# Altium PCB PS2Transiever.PcbDoc
Units mm, origin at the board's own origin, x right, y up, seen from the top; angles counter-clockwise.
Board outline 40 x 27 mm, 2 copper layers (Top Layer, Bottom Layer), stack 1.571 mm thick; 10 components, 12 nets, 36 pads, 4 vias.
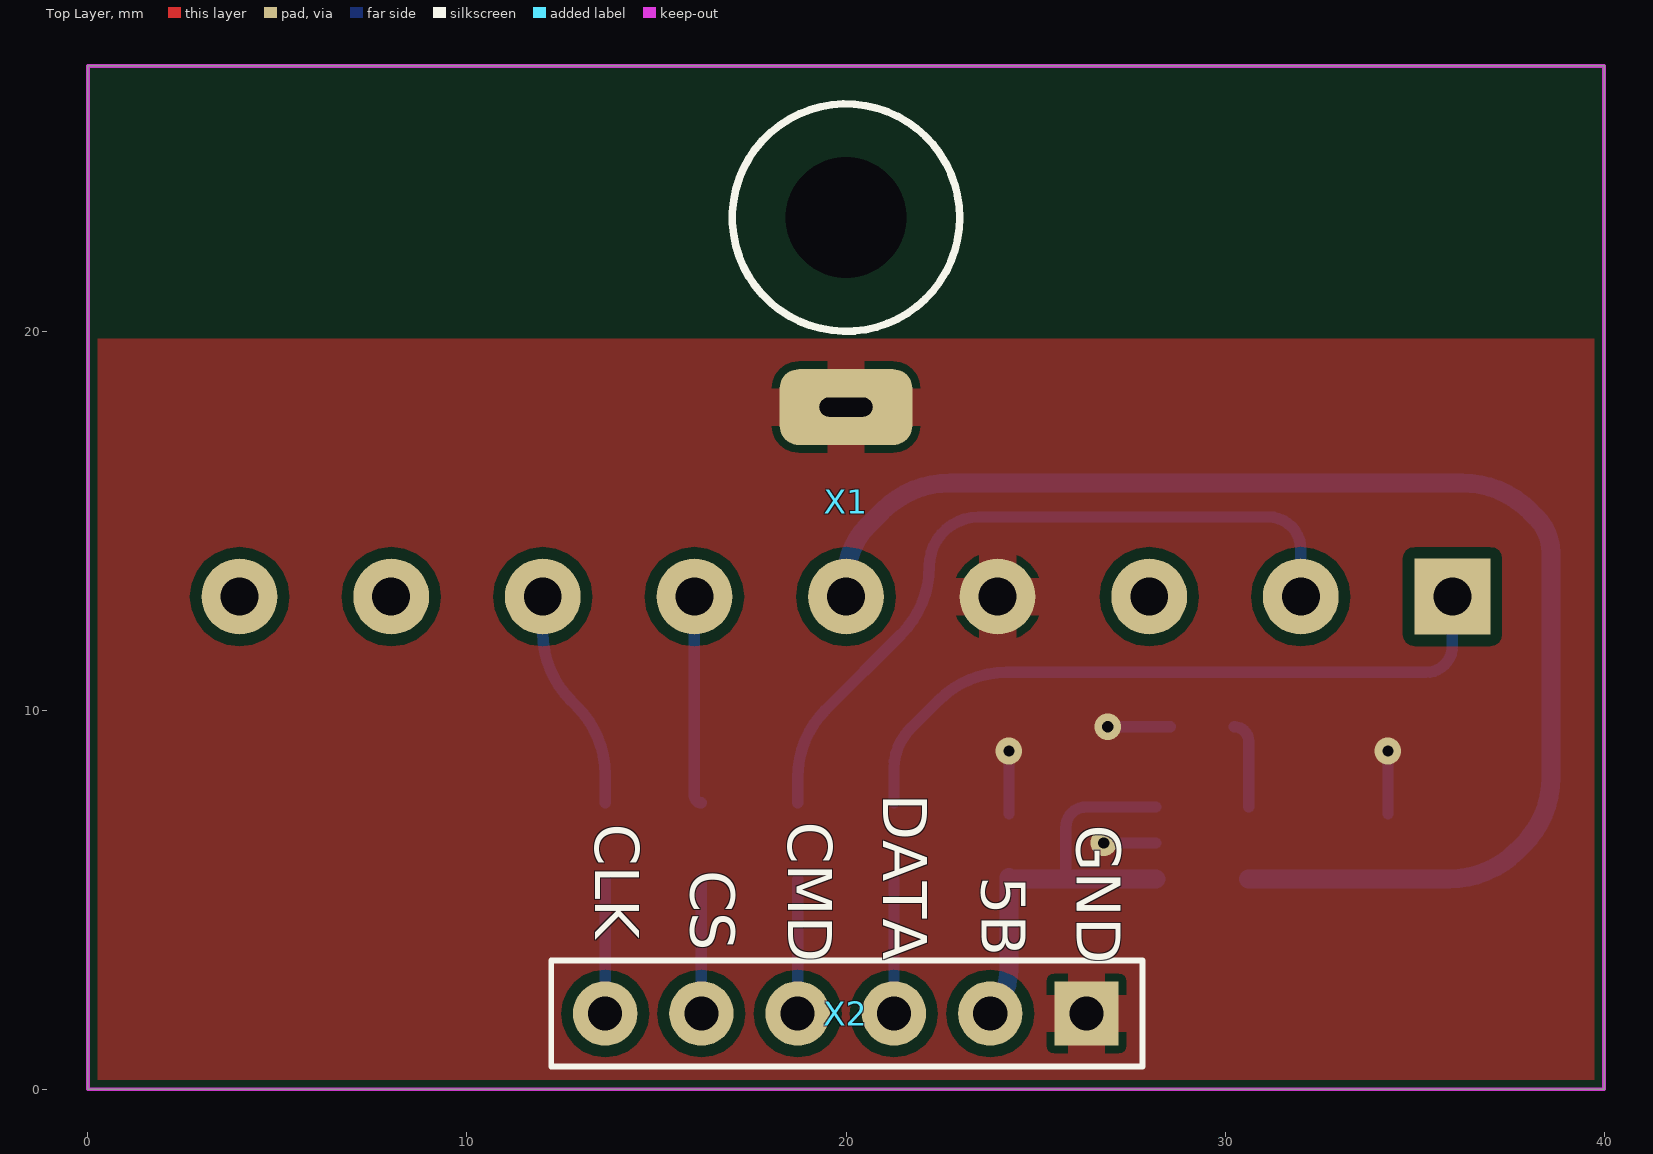
[diagram p0: Top Layer view]
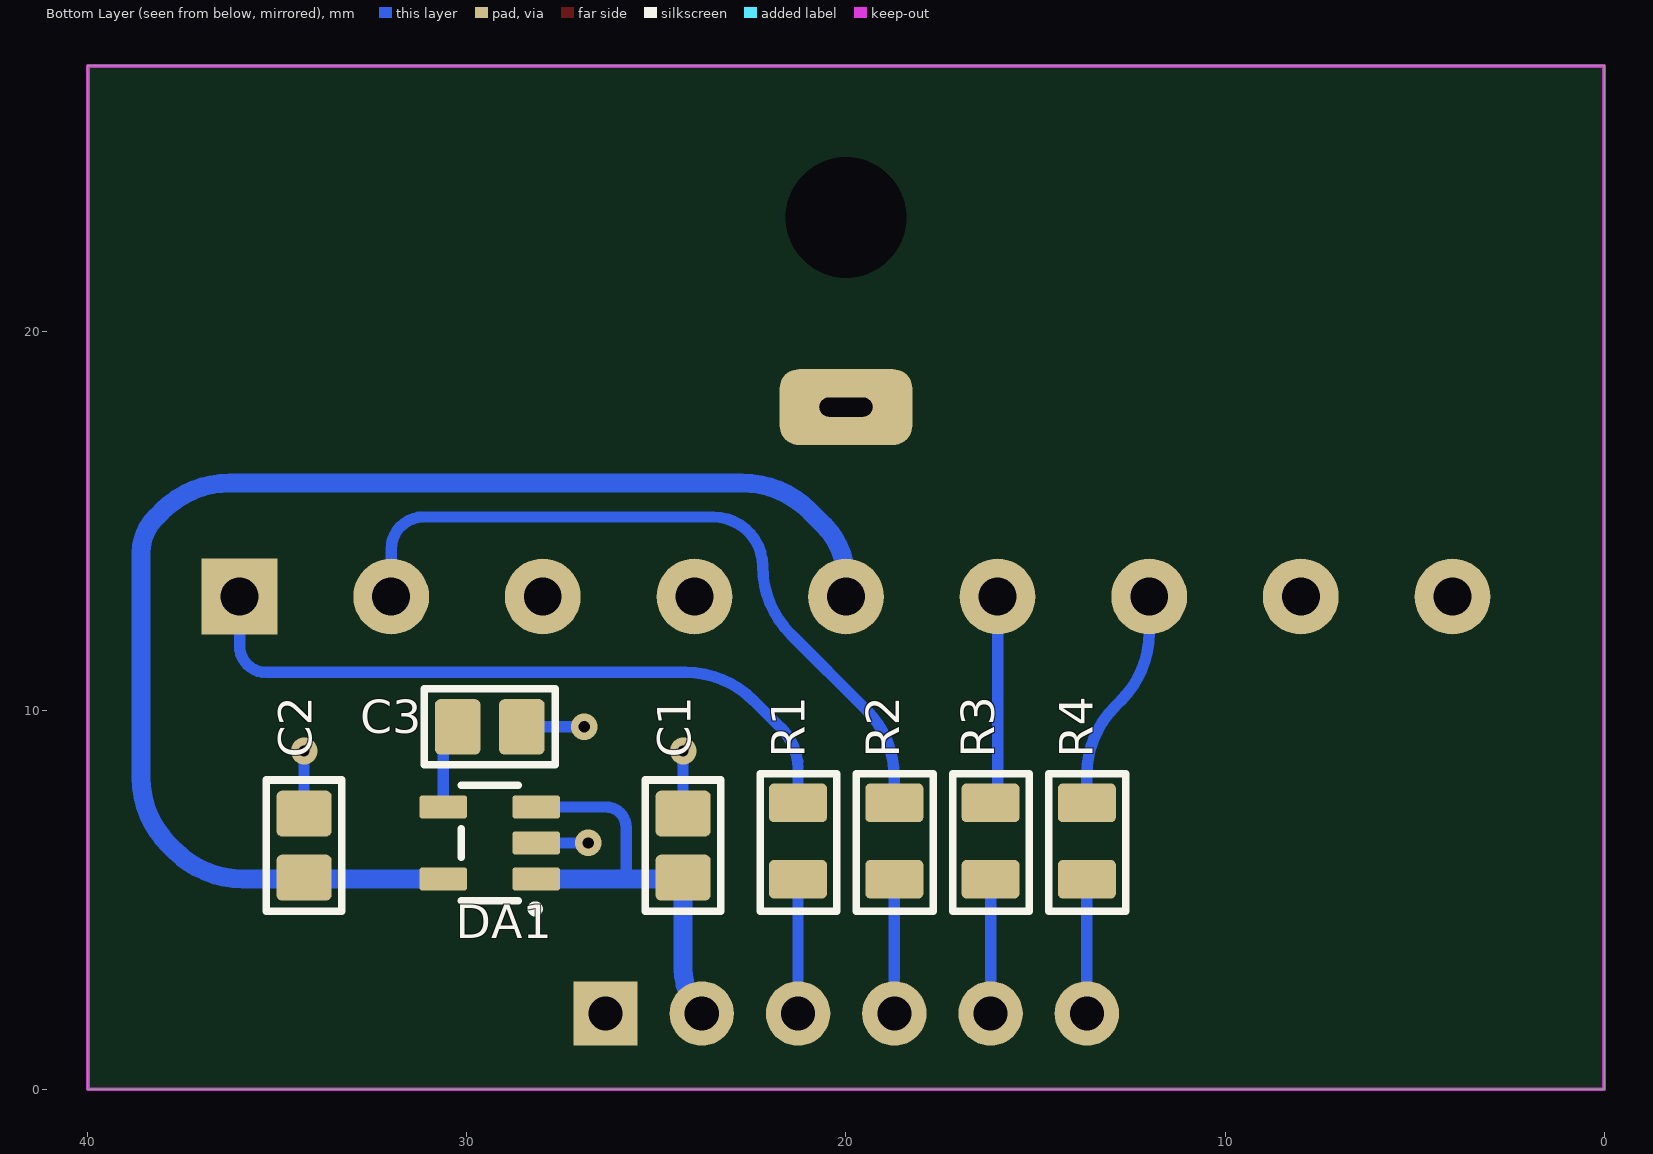
[diagram p1: Bottom Layer view, seen from below]
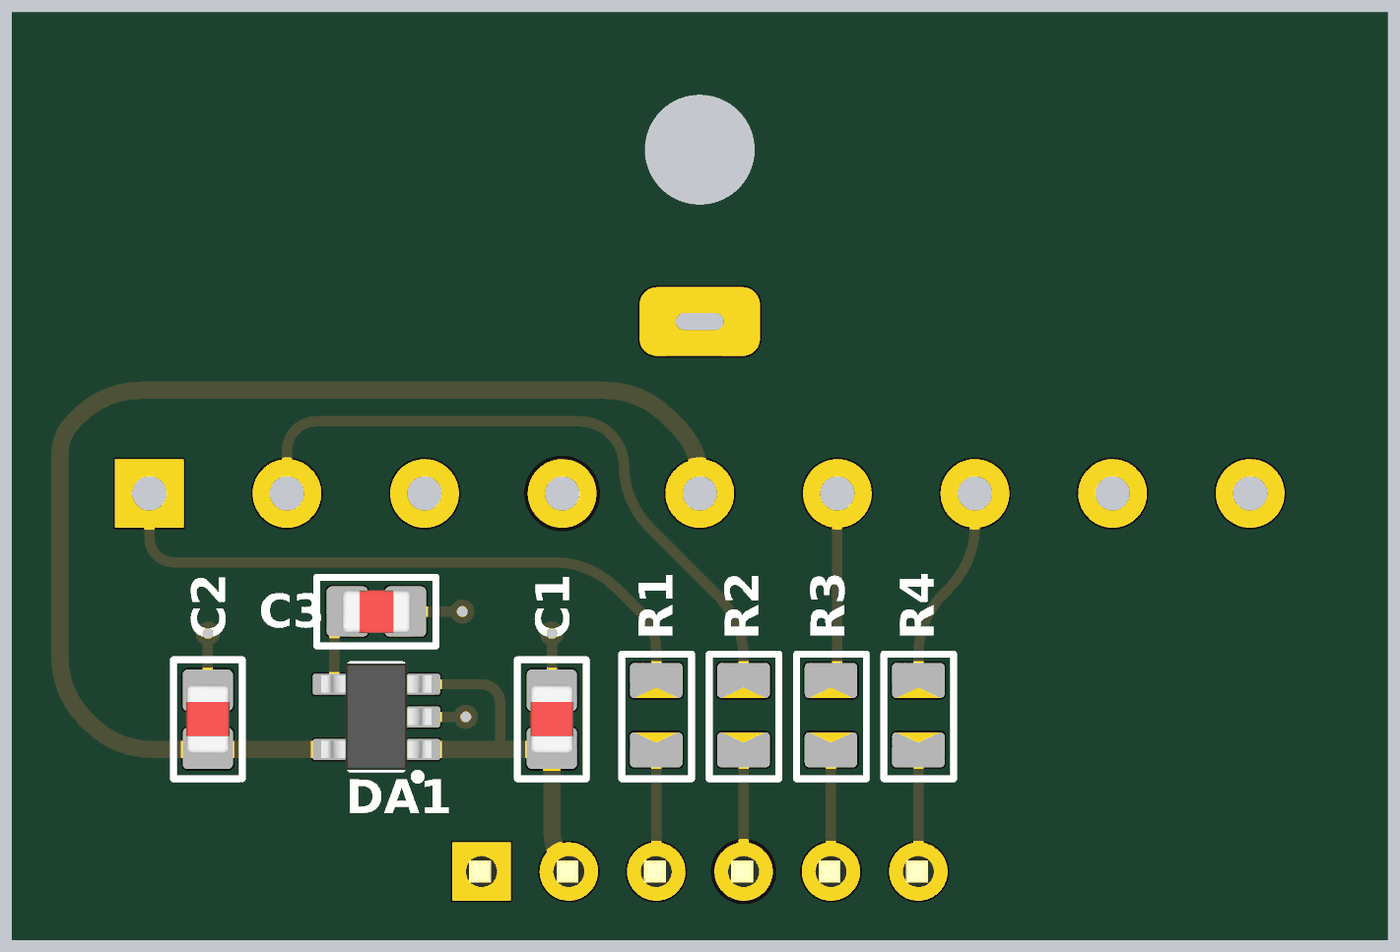
[diagram p2: 3D render of the assembled board from below, using the file's embedded part models]

## Layer stack, top to bottom
Top Solder: solder mask 0.0102, Solder Resist, Dk 3.5
Top Layer: signal copper 0.0356
Dielectric 1: dielectric 1.5, FR-4, Dk 4.8
Bottom Layer: signal copper 0.0356
Bottom Solder: solder mask 0.0102, Solder Resist, Dk 3.5

## Board outline
0,0 0,27 40,27 40,0

## Design rules (kind name [scope] priority, off if disabled: settings)
Clearance Clearance_POWER_12B [InNet('12B') vs InNet('GND')] p1: gap=0.5 ignorepadtopadclearanceinfootprint=FALSE except(0: Arc-Hole Track-Hole SMDPad-Hole THPad-Hole Via-Hole Fill-Hole Poly-Hole Region-Hole Text-Hole; 0.2: Arc-SMDPad Arc-Via Track-SMDPad Track-Via SMDPad-SMDPad SMDPad-Via)
Clearance Clearance_POWER_12B_1 [InNet('NetVT1_2') vs InNet('GND')] p2: gap=0.5 ignorepadtopadclearanceinfootprint=FALSE except(0: Arc-Hole Track-Hole SMDPad-Hole THPad-Hole Via-Hole Fill-Hole Poly-Hole Region-Hole Text-Hole)
Clearance Clearance_POWER_12B_2 [InNet('NetC1_1') vs InNet('GND')] p3: gap=0.5 ignorepadtopadclearanceinfootprint=FALSE except(0: Arc-Hole Track-Hole SMDPad-Hole THPad-Hole Via-Hole Fill-Hole Poly-Hole Region-Hole Text-Hole)
Clearance Clearance_POWER_5B [InNet('5B') vs InNet('GND')] p4: gap=0.3 ignorepadtopadclearanceinfootprint=FALSE except(0: Arc-Hole Track-Hole SMDPad-Hole THPad-Hole Via-Hole Fill-Hole Poly-Hole Region-Hole Text-Hole; 0.2: SMDPad-SMDPad; 0.4: Arc-THPad Track-THPad THPad-THPad THPad-Fill THPad-Poly THPad-Region; 0.5: Arc-Fill Arc-Poly Arc-Region Track-Fill Track-Poly Track-Region)
Clearance [All] p5: gap=0.2 ignorepadtopadclearanceinfootprint=FALSE except(0: Arc-Hole Track-Hole SMDPad-Hole THPad-Hole Via-Hole Fill-Hole Poly-Hole Region-Hole Text-Hole; 0.3: Arc-THPad Track-THPad THPad-THPad THPad-Via THPad-Fill THPad-Poly THPad-Region THPad-Text)
ComponentClearance [All] p1: gap=0.05 collisioncheckmode=3 verticalgap=0.05 showdistances=FALSE
HoleSize [All] p1: absolutevalues=TRUE maxlimit=5 minlimit=0.2 maxpercent=80.000 minpercent=20.000
HoleToHoleClearance [All] p1: gap=0 allowstackedmicrovias=TRUE
MinimumSolderMaskSliver [All] p1: minsoldermaskwidth=0.05
PolygonConnect NetTieDirect [InComponentClass('NetTieDirect')] p1: connectstyle=Direct reliefconductorwidth=0.254 reliefentries=4 polygonreliefangle="90 Angle" airgapwidth=0.254
PolygonConnect NetTieRelief [InComponentClass('NetTieRelief')] p2: connectstyle=Direct reliefconductorwidth=0.6 reliefentries=4 polygonreliefangle="90 Angle" airgapwidth=0.2
PolygonConnect PolygonConnect_GND_2 [HasFootprint('XT60-M') And OnLayer('Bottom Layer') vs InNet('GND')] p3: connectstyle=Relief reliefconductorwidth=4 reliefentries=4 polygonreliefangle="90 Angle" airgapwidth=0.254
PolygonConnect PolygonConnect_GND [InNet('GND')] p4: connectstyle=Relief reliefconductorwidth=1 reliefentries=4 polygonreliefangle="90 Angle" airgapwidth=0.2
PolygonConnect PolygonConnect_GND_12B [InNet('NetVT1_2')] p5: connectstyle=Relief reliefconductorwidth=4 reliefentries=4 polygonreliefangle="90 Angle" airgapwidth=0.2
PolygonConnect PolygonConnect_GND_12B_3 [InNet('6B_Servo')] p6: connectstyle=Relief reliefconductorwidth=1 reliefentries=4 polygonreliefangle="90 Angle" airgapwidth=0.2
PolygonConnect PolygonConnect_GND_12B_2 [InNet('NetC1_1')] p7: connectstyle=Relief reliefconductorwidth=1 reliefentries=4 polygonreliefangle="90 Angle" airgapwidth=0.2
PolygonConnect PolygonConnect_GND_12B_1 [InNet('12B')] p8: connectstyle=Relief reliefconductorwidth=1 reliefentries=4 polygonreliefangle="90 Angle" airgapwidth=0.2
PolygonConnect PolygonConnect_GND_1 [HasFootprint('TERMINAL 3 way-3.5mm') vs InNet('GND')] p9: connectstyle=Direct reliefconductorwidth=0.6 reliefentries=4 polygonreliefangle="90 Angle" airgapwidth=0.2
PolygonConnect PolygonConnect_via [IsVia] p10: connectstyle=Direct reliefconductorwidth=0.6 reliefentries=4 polygonreliefangle="90 Angle" airgapwidth=0.2
PolygonConnect [All] p11: connectstyle=Relief reliefconductorwidth=0.6 reliefentries=4 polygonreliefangle="90 Angle" airgapwidth=0.2
RoutingVias [All] p1: holewidth=0.711 width=1.27 viastyle="Through Hole" minholewidth=0.711 minwidth=1.27 maxholewidth=0.711 maxwidth=1.27
SilkToSilkClearance [All] p1: silktosilkclearance=0
SilkToSolderMaskClearance [IsPad] p1: minsilkscreentomaskgap=0 clearancetoexposedcopper=TRUE
SolderMaskExpansion [All] p1: expansion=0.05
Width [All] p1: maxlimit=3 minlimit=0.2 preferedwidth=0.3
24 further rules are at their usual default settings.

## Components (designator, comment, footprint, x,y, rotation, side; value= is the part's Value field where it differs from the comment)
C1 "0,1мк" C0805 24.3,6.43 r270 bottom
C2 "0,1мк" C0805 34.3,6.43 r270 bottom
C3 "0,01мк" C0805 29.4,9.563 r0 bottom
DA1 "LD3985" SOT23-5 29.4,6.5 r0 bottom
R1 "Resistor_0,125Вт" R0805 21.265,6.55 r270 bottom value=47
R2 "Resistor_0,125Вт" R0805 18.725,6.55 r270 bottom value=47
R3 "Resistor_0,125Вт" R0805 16.185,6.55 r270 bottom value=47
R4 "Resistor_0,125Вт" R0805 13.645,6.55 r270 bottom value=47
X1 "Header_9_sct" "PS2-9PIN HEADER" 20,13 r270 top
X2 "Header_6_plg" PLS-6 20,2 r270 top

## Footprints (in the part's own frame and the unit in brackets; to place one, negate y for a bottom-side part, rotate by r counter-clockwise, add the part's x,y. Pads: shape width x height; smd on the part's side, far side on the other; paste and mask are expansions set on the pad)
C0805 [mm]
  rrect25% 1.21x1.46 smd paste-5: 1(-0.845,0) 2(0.845,0)
  silkscreen extent -1.73,-1 1.73,1, body extent -1,-0.62 1,0.63, height 0.78
PLS-6 [mm]
  rect 1.7x1.7 hole 0.9: 1(0,6.345)
  round 1.7 hole 0.9: 2(0,3.805) 3(0,1.265) 5(0,-3.815) 6(0,-6.355)
  round 1.7 hole 0.9 mask+0.102: 4(0,-1.275)
  silkscreen extent -1.4,-7.78 1.4,7.83, body extent -1.27,-7.58 1.27,7.66, height 8.54
"PS2-9PIN HEADER" [mm]
  rect 2x2 hole 1: 1(0,16)
  round 2 hole 1: 2(0,12) 3(0,8) 5(0,0) 6(0,-4) 7(0,-8) 8(0,-12) 9(0,-16)
  rrect50% 2x3.5 hole 0.5 slot 1.4 at 90 deg: 4(-5,0)
  round 2 hole 1 mask+0.102: 4(0,4)
R0805 [mm] "Chip Resistor, 2-Leads, Body 2,10x1,30mm, IPC Medium Density"
  rrect25% 1.02x1.53 smd paste-5: 1(-1.007,0) 2(1.007,0)
  silkscreen extent -1.78,-1 1.85,1.02, body extent -1.1,-0.7 1.1,0.7, height 0.55
SOT23-5 [mm]
  rrect25% 1.26x0.61 smd: 1(-1.225,0.95) 2(-1.225,0) 3(-1.225,-0.95) 4(1.225,-0.95) 5(1.225,0.95)
  silkscreen extent -1.3,-1.52 0.75,1.84, body extent -1.6,-1.55 1.6,1.55, height 1.45

## Part data
C1 C2: library part cap160, "Конденсатор", Manufacture=Murata, Part Name=Ceramic, Part Number=GRM21BR71H104KA01L, Voltage=50В, id=cap160, TKE=X7R
C3: library part cap136, "Конденсатор", Manufacture=Murata, Part Name=Ceramic, Part Number=GRM216R71H103K, Voltage=50B, id=cap136, TKE=X7R
DA1: library part pwr139, "Ultra low drop and low noise BiCMOS voltage regulators", Current=150mA, Dropout Voltage=60mB, Input Voltage=2,5-6В, Manufacturer="ST Microelectronics", Output Voltage=3,3В, Part Number=LD3985M33R, id=pwr139, Part Name="Ultra low drop and low noise BiCMOS voltage regulators", Type=Linear
R1 R2 R3 R4: library part res41, "Резистор", Manufacture=Yageo, Part Name=Resistor, Part Number=RC0805FR-0747RL, Power=0,125Вт, Accuracy=0,01, id=res41
X1: library part connect132, "Разъем - 9 конт. розетка", Manufacture="Play Station", Part Name="Play Station Header 9 pin", Contact_1=DATA, Contact_2=COMMAND, Contact_3=VIBRATION, Contact_4=GND, Contact_5=3,3B, Contact_6=ATTENTION, Contact_7=CLOCK, Contact_8=UNKNOWN, Contact_9=ACKNOLEDGE, Etch=4mm, id=connect132
X2: library part connect5, "Разъем - 6 конт. вилка", Manufacture="Ningbo connfly electronic", Part Name=PLS-6, Part Number=DS1021-1*6SF112-B, Contact_1=GND, Contact_2=+5B, Contact_3=DAT, Contact_4=CMD, Contact_5=CS, Contact_6=CLK, Etch=2,54mm, id=connect5

## Free pads (board coordinates)
  round 0 hole 3.2 unplated: ""(20,23)

## Via types
v1: diameter 0.7, hole 0.3, Top Layer to Bottom Layer, tented both sides, 4 vias

## Nets (pads, with @x,y where several pads share a name; then routed paths per layer and width w, separated by ;. In a path a pad name is that pad's centre, name@x,y a point inside that pad or via, vN(x,y) a via of type N, cw(c..) or ccw(c..) an arc to the next point about the centre after c; other vN are vias at no path point)
+3,3B: C2.2 DA1.5 X1.5 | length 36.7
  Bottom Layer w0.5: X1.5 20,13.451 cw(c22.049,13.451) 20.6,14.9 20.956,15.256 cw(c22.752,13.46) 22.752,16 36.248,16 cw(c36.248,13.46) 38.044,15.256 38.218,15.082 cw(c37.296,14.16) 38.6,14.16 38.6,8.225 cw(c36.089,8.225) 37.865,6.45 37.709,6.294 cw(c35.913,8.09) 35.913,5.55 DA1.5
+5B: C1.2 DA1.1 DA1.3 X2.2 | length 11.7
  Bottom Layer w0.3: 25.9,5.55 cw(c25.9,5.65) 25.8,5.65 25.8,6.91 cw(c26.34,6.91) 26.34,7.45 DA1.3
  Bottom Layer w0.5: X2.2 ccw(c22.61,3.195) 24.3,3.195 C1.2 ccw(c24.335,5.585) 24.335,5.55 25.9,5.55 DA1.1
GND: C1.1 C2.1 C3.1 DA1.2 X1.4 X2.1 | length 6.3
  Bottom Layer w0.3: C1.1 v1(24.3,8.926) ; v1(26.8,6.5) DA1.2 ; v1(26.904,9.563) C3.1 ; C2.1 v1(34.3,8.926)
NetC3_2: C3.2 DA1.4 | length 2.3
  Bottom Layer w0.3: C3.2 cw(c30.245,9.183) 30.625,9.183 DA1.4
NetR1_1: R1.1 X1.1 | length 18.6
  Bottom Layer w0.3: R1.1 21.265,8.464 cw(c22.761,8.464) 21.703,9.522 22.437,10.256 cw(c24.233,8.46) 24.233,11 35.3,11 ccw(c35.3,11.7) 36,11.7 X1.1
NetR1_2: R1.2 X2.3 | length 3.5
  Bottom Layer w0.3: X2.3 R1.2
NetR2_1: R2.1 X1.2 | length 19.7
  Bottom Layer w0.3: R2.1 18.725,8.223 cw(c21.265,8.223) 19.469,10.019 21.458,12.008 ccw(c19.665,13.8) 22.2,13.8 cw(c23.5,13.8) 23.5,15.1 31.15,15.1 cw(c31.15,14.25) 32,14.25 X1.2
NetR2_2: R2.2 X2.4 | length 3.5
  Bottom Layer w0.3: X2.4 R2.2
NetR3_1: R3.1 X1.6 | length 5.5
  Bottom Layer w0.3: X1.6 16,7.742 ccw(c16.185,7.742) R3.1
NetR3_2: R3.2 X2.5 | length 3.5
  Bottom Layer w0.3: X2.5 R3.2
NetR4_1: R4.1 X1.7 | length 5.9
  Bottom Layer w0.3: X1.7 12,12.052 ccw(c14.54,12.052) 12.744,10.256 12.901,10.099 cw(c11.105,8.303) 13.645,8.303 R4.1
NetR4_2: R4.2 X2.6 | length 3.5
  Bottom Layer w0.3: X2.6 R4.2
pads on no net: X1.3 X1.8 X1.9

## Polygon pours and split planes (outlines as drawn)
GND on Top Layer "Top Signal Layer-No Net" (solid, remove dead copper, pour order 0): 0,19.8 0,0 40,0 40,19.8

## Keep-outs
Keep-Out Layer:
  lines w0.1: 0,0 34,0 40,0 40,6 40,27 0,27 0,0

## Silkscreen, mask and mechanical layers (free items; w line width, h text height)
Top Overlay:
  circle w0.2: c20,23 r3
  text "DATA" at 20.6,7.8 h2 r270
  text "CMD" at 18.1,7.054 h2 r270
  text "CLK" at 13,7 h2 r270
  text "GND" at 25.7,6.974 h2 r270
  text "CS" at 15.52,5.78 h2 r270
  text "5B" at 23.2,5.624 h2 r270